# Altium PCB Snippet of PCB_Audio_jack.pcbdoc
Units mil, origin at the board's own origin, x right, y up, seen from the top; angles counter-clockwise.
Board outline not stored, 2 copper layers (Top Layer, Bottom Layer); 4 components, 0 nets, 17 pads, 0 vias.
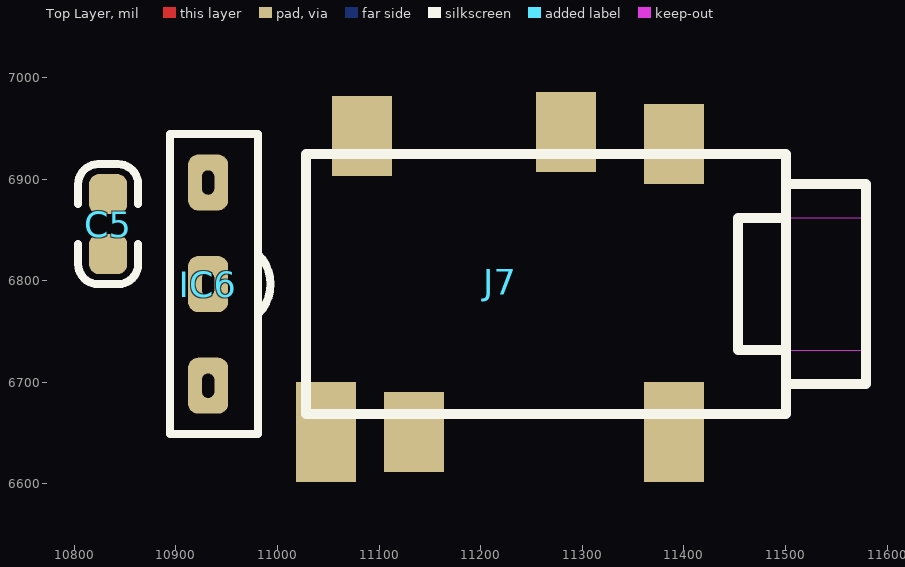
[diagram p0: Top Layer view]
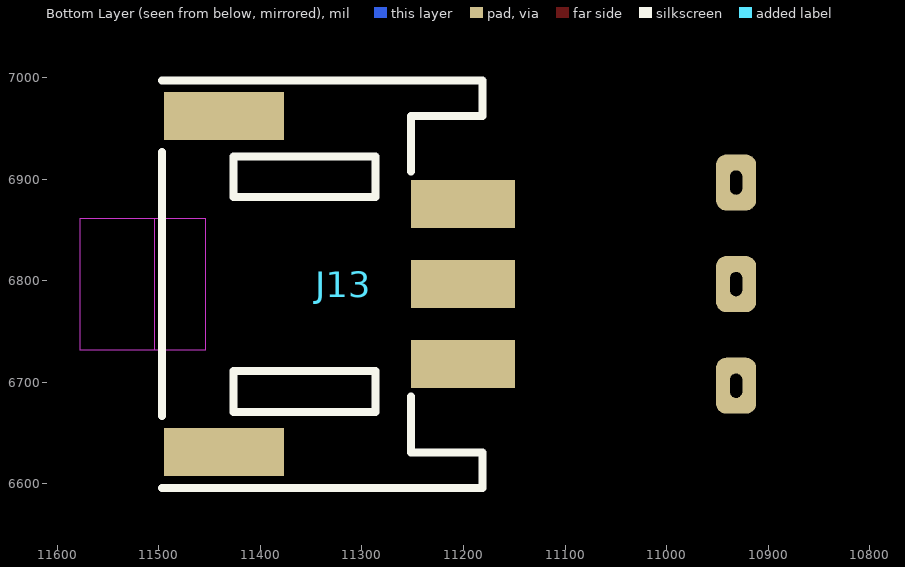
[diagram p1: Bottom Layer view, seen from below]

## Layer stack, top to bottom
Top Solder: solder mask 0.4, Solder Resist, Dk 3.5
Top Layer: signal copper 1.4
Dielectric 1: dielectric 12.6, FR-4, Dk 4.8
Bottom Layer: signal copper 1.4
Bottom Solder: solder mask 0.4, Solder Resist, Dk 3.5

## Components (designator, comment, footprint, x,y, rotation, side; value= is the part's Value field where it differs from the comment)
C5 "100nF" C_0603 10833.23,6855.59 r270 top
IC6 "PTL237/L5" PLT237/L5 10931.65,6796.54 r90 top
J7 "PJ-316A-6A" PJ-316A-6A 11219.06,6796.54 r270 top
J13 "PH_2.0-3P" PH_2.0WS-3P 11313.54,6796.54 r270 bottom

## Footprints (in the part's own frame and the unit in brackets; to place one, negate y for a bottom-side part, rotate by r counter-clockwise, add the part's x,y. Pads: shape width x height; smd on the part's side, far side on the other; paste and mask are expansions set on the pad)
C_0603 [mm] "Chip Capacitor, 2-Leads, Body 1.60x0.80mm, IPC Medium Density"
  rrect50% 1x0.95 smd: 1(-0.75,0) 2(0.75,0)
  silkscreen extent -1.5,-0.75 1.5,0.75, body extent -0.8,-0.4 0.8,0.4, height 0.87
PH_2.0WS-3P [mm]
  rect 1.2x3 smd: 0(-4.2,-3.1) 0(4.2,-3.1)
  rect 1.2x2.6 smd: 1(-2,2.875) 2(0,2.875) 3(2,2.875)
  silkscreen extent -5.1,-4.65 5.1,3.35, body extent -4.95,-4.7 4.95,3.9, height 5.6
PJ-316A-6A [mm]
  rect 2x1.5 smd: 1(-3.5,4.35) 2(3.7,-2.15) 3(-3.8,1.65) 6(-3.7,-3.45)
  rect 2.5x1.5 smd: 4(3.7,4.35) 5(3.7,-4.35)
  round 1.1 hole 1.3 unplated: ""(0,-3.429)
  Keep-Out Layer board cut-out: -1.651,5.969 1.651,5.969 1.651,7.239 -1.651,7.239
  Keep-Out Layer board cut-out: -1.651,5.969 1.651,5.969 1.651,9.098 -1.651,9.098
  silkscreen extent -3.25,-4.85 3.25,9.15, body extent -4.05,-4.9 4.25,9.1, height 4.4
PLT237/L5 [mm]
  rrect50% 1.4x1 hole 0.6 slot 0.3 at 90 deg: 1(2.54,0) 2(0,0) 3(-2.54,0)
  silkscreen extent -3.75,-1.56 3.75,0.95, body extent -3.75,-1.25 3.75,1, height 3

## Part data
C5: library part Cap_Chip, "贴片电容"
IC6: library part Audio_PTL237/L5, "光纤发射模组"
J7: library part Audio_PJ-316A-6A, "3.5音频链接座子", BOM_Manufacturer=HRO, BOM_Manufacturer Part=PJ-316A-6A, BOM_Supplier Part=C128987

## Nets (pads, with @x,y where several pads share a name; then routed paths per layer and width w, separated by ;. In a path a pad name is that pad's centre, name@x,y a point inside that pad or via, vN(x,y) a via of type N, cw(c..) or ccw(c..) an arc to the next point about the centre after c; other vN are vias at no path point)
pads on no net: C5.1 C5.2 IC6.1 IC6.2 IC6.3 J7. J7.1 J7.2 J7.3 J7.4 J7.5 J7.6 J13.0 J13.1 J13.2 J13.3

## Text inside footprints (layer, text, board x,y; h text height)
J7: Mechanical 1 "CNC" at 11464.06,6766.54 h80